# Altium PCB LEDPCB1.PcbDoc
Units mil, origin at the board's own origin, x right, y up, seen from the top; angles counter-clockwise.
Board outline 795 x 640 mil, 2 copper layers (Top Layer, Bottom Layer); 3 components, 3 nets, 6 pads, 0 vias.
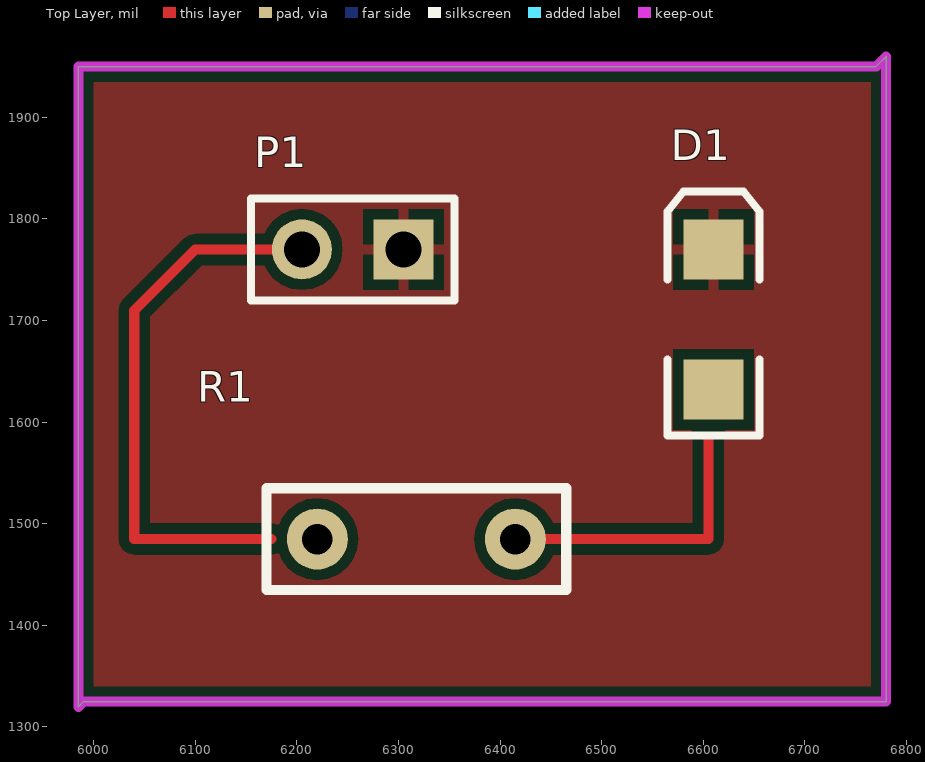
[diagram p0: Top Layer view]
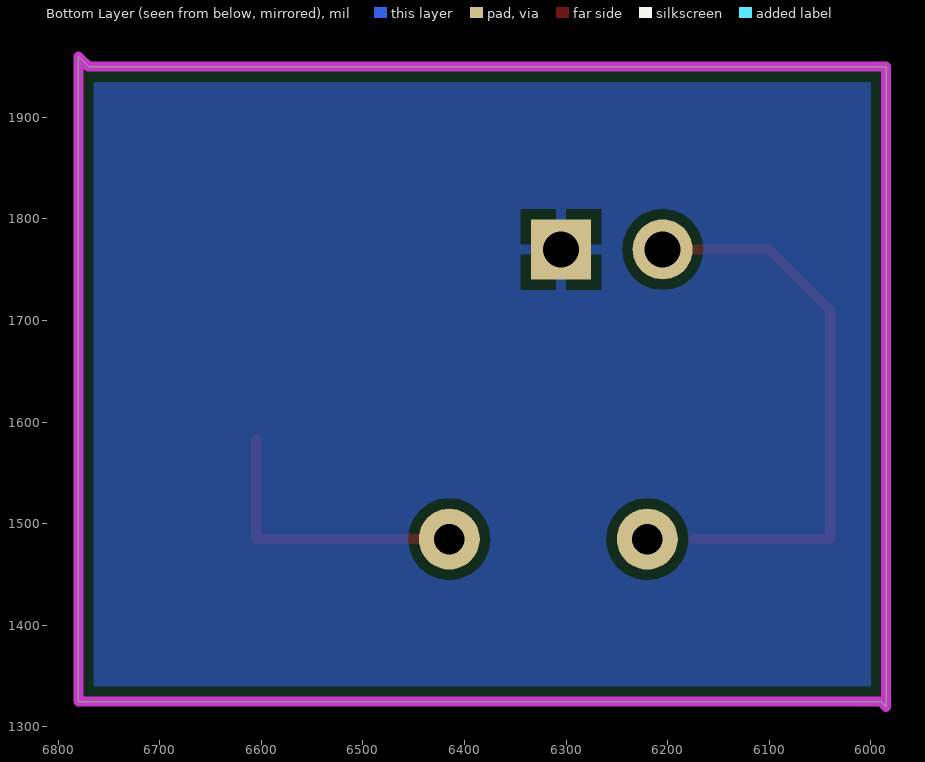
[diagram p1: Bottom Layer view, seen from below]

## Layer stack, top to bottom
Top Solder: solder mask 0.4, Solder Resist, Dk 3.5
Top Layer: signal copper 1.4
Dielectric 1: dielectric 12.6, FR-4, Dk 4.8
Bottom Layer: signal copper 1.4
Bottom Solder: solder mask 0.4, Solder Resist, Dk 3.5

## Board outline
5985,1320 5985,1950 6770,1950 6780,1960 6780,1325 5990,1325

## Design rules (kind name [scope] priority, off if disabled: settings)
Clearance [All] p1: gap=10
PolygonConnect [All] p1: connectstyle=Relief reliefconductorwidth=10 reliefentries=4 polygonreliefangle="90 Angle" airgapwidth=10
RoutingVias [All] p1: holewidth=28 width=50 viastyle="Through Hole" minholewidth=28 minwidth=50 maxholewidth=28 maxwidth=50
SolderMaskExpansion [All] p1: expansion=4
Width [All] p1: maxlimit=10 minlimit=10 preferedwidth=10
30 further rules are at their usual default settings.

## Classes and differential pairs
component class LEDsheet: D1 P1

## Components (designator, comment, footprint, x,y, rotation, side; value= is the part's Value field where it differs from the comment)
D1 "LED2" 3.2X1.6X1.1 6610,1701.1 r90 top
P1 "Header 2" HDR1X2 6305,1770 r180 top
R1 "Comment" RES_My_lead 6220.12,1485 r0 top

## Footprints (in the part's own frame and the unit in brackets; to place one, negate y for a bottom-side part, rotate by r counter-clockwise, add the part's x,y. Pads: shape width x height; smd on the part's side, far side on the other; paste and mask are expansions set on the pad)
3.2X1.6X1.1 [mm] "SMT LED; 2 Flat Leads"
  rect 1.5x1.5 smd: 1(-1.75,0) 2(1.75,0)
  silkscreen extent -2.9,-1.15 3.2,1.15
HDR1X2 [mm] "Connector; Header; 2 Position"
  rect 1.5x1.5 hole 0.9: 1(0,0)
  round 1.5 hole 0.9: 2(2.54,0)
  silkscreen extent -1.27,-1.27 3.81,1.27
RES_My_lead [mil]
  round 60 hole 30: 1(0,0) 2(194.88,0)
  silkscreen extent -50,-50 245,50, body extent -123,-127 203,110, height 869

## Part data
D1: "Typical RED, GREEN, YELLOW, AMBER GaAs LED"
P1: "Header, 2-Pin"

## Nets (pads, with @x,y where several pads share a name; then routed paths per layer and width w, separated by ;. In a path a pad name is that pad's centre, name@x,y a point inside that pad or via, vN(x,y) a via of type N, cw(c..) or ccw(c..) an arc to the next point about the centre after c; other vN are vias at no path point)
GND: D1.2 P1.1
NetD1_1: D1.1
VCC: P1.2 | length 550
  Top Layer w10: 6175.12,1485 6040,1485 6040,1710 6100,1770 P1.2
pads on no net: R1.1 R1.2
copper on no net: | length 183606.7
  Top Layer w10: 6365,12145 6075,12435 6075,33685 6025,33735 6025,44095 9560,47630 10815,47630 20680,37765 20680,64570 20710,64600 23850,67740 25485,67740 29585,63640 35920,63640 36050,63770 36050,74510 46985,85445 74370,85445 87360,98435 87360,99445 87395,99410 87984,99999 99005,99999 99330,99999 99330,99415 ; 6415,1485 6605,1485 6605,1582.68

## Polygon pours and split planes (outlines as drawn)
GND on Top Layer "Top Layer-No Net" (solid, remove dead copper, pour order 0): 5985,1320 5985,1950 6770,1950 6780,1960 6780,1325 5990,1325
GND on Bottom Layer "BOTTOM LAYER" (solid, remove dead copper, pour order 1): 5985,1320 5985,1950 6770,1950 6780,1960 6780,1325 5990,1325

## Keep-outs
Keep-Out Layer:
  the board outline again, w10